# Altium PCB NBP15 Xilinx XC9500XL XC9500XV PQ208 Rev1.01.PcbDoc (part 1 of 2)
Units mm, origin at the board's own origin, x right, y up, seen from the top; angles counter-clockwise.
Board outline 69 x 80.99 mm, 2 copper layers (Top Layer, Bottom Layer); 37 components, 186 nets, 485 pads, 89 vias.
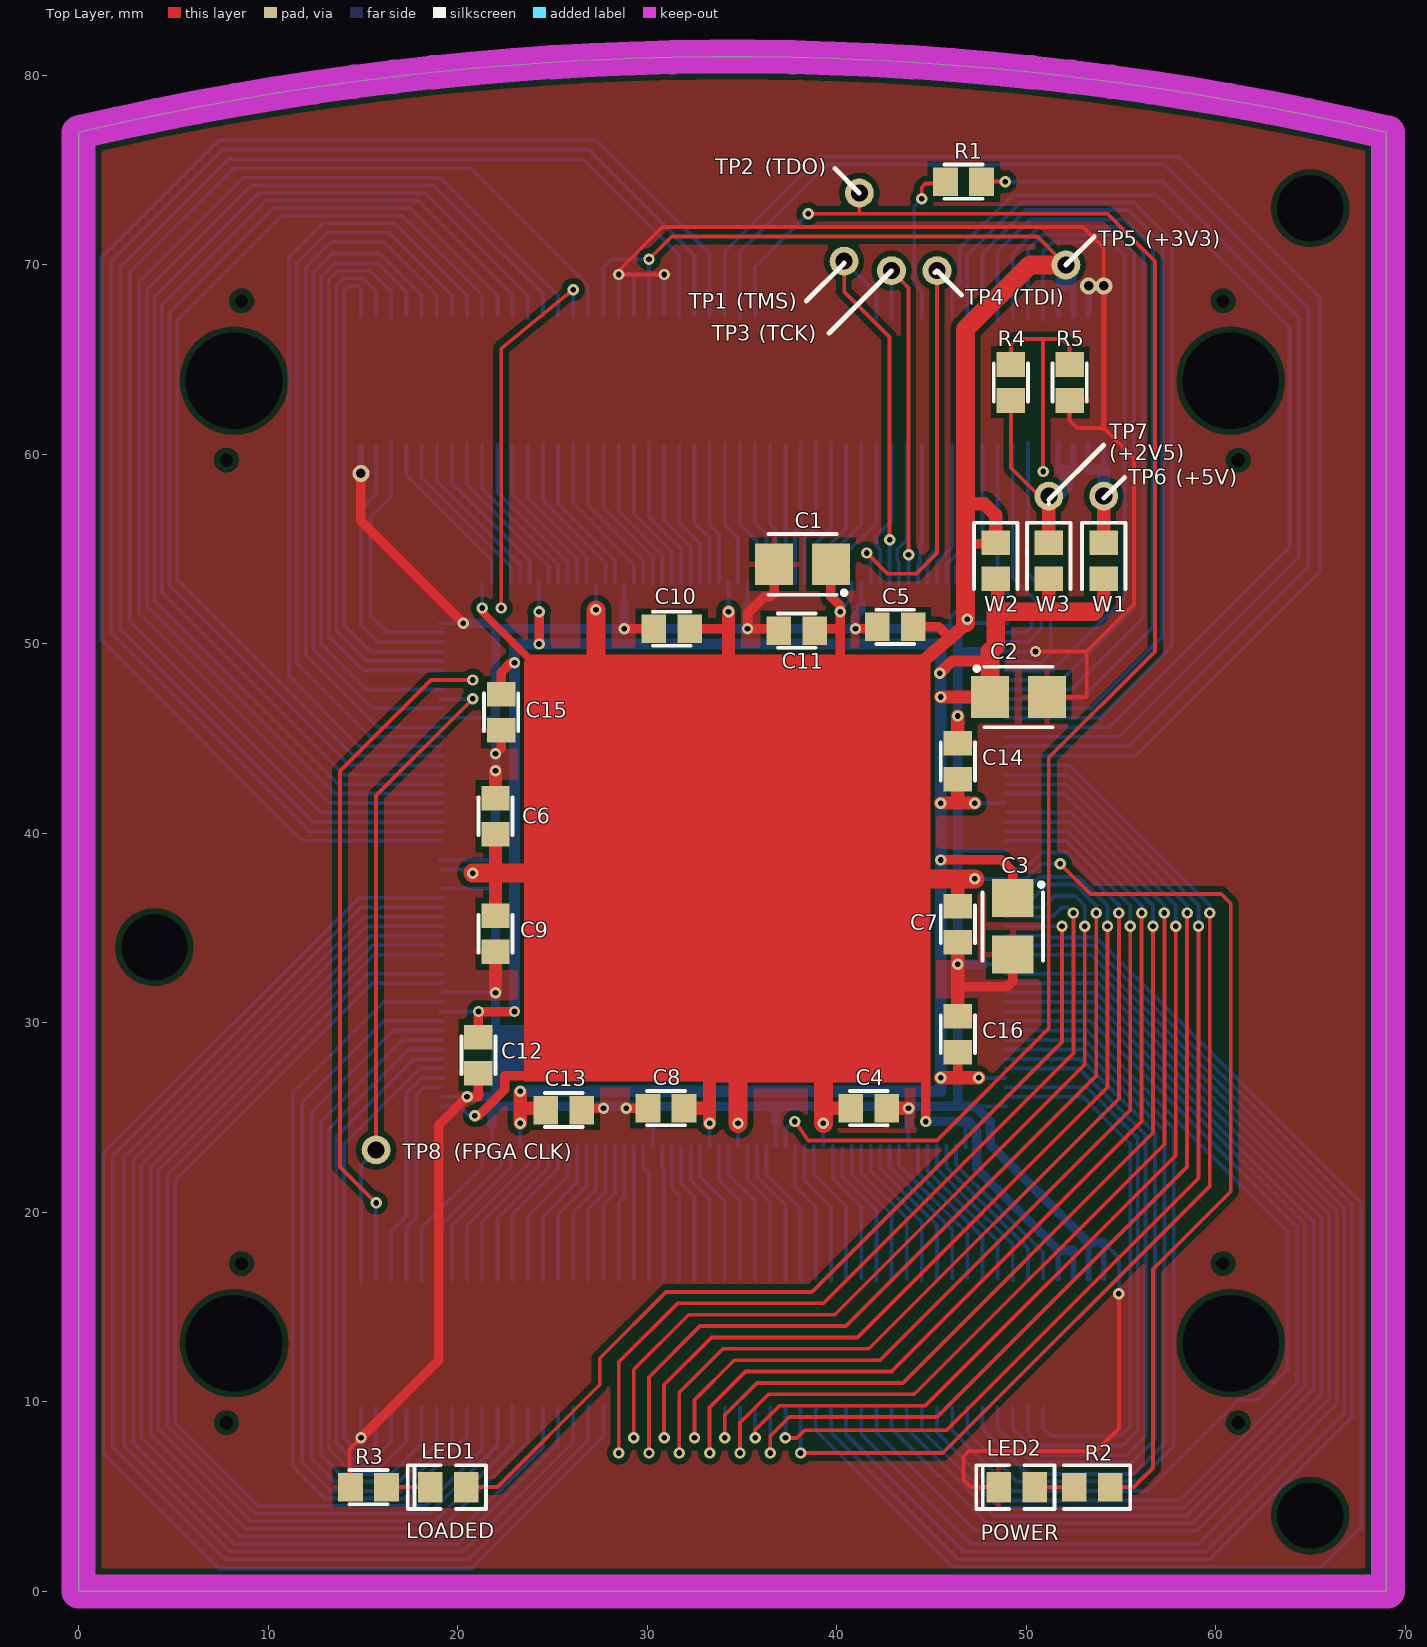
[diagram p0: Top Layer view]
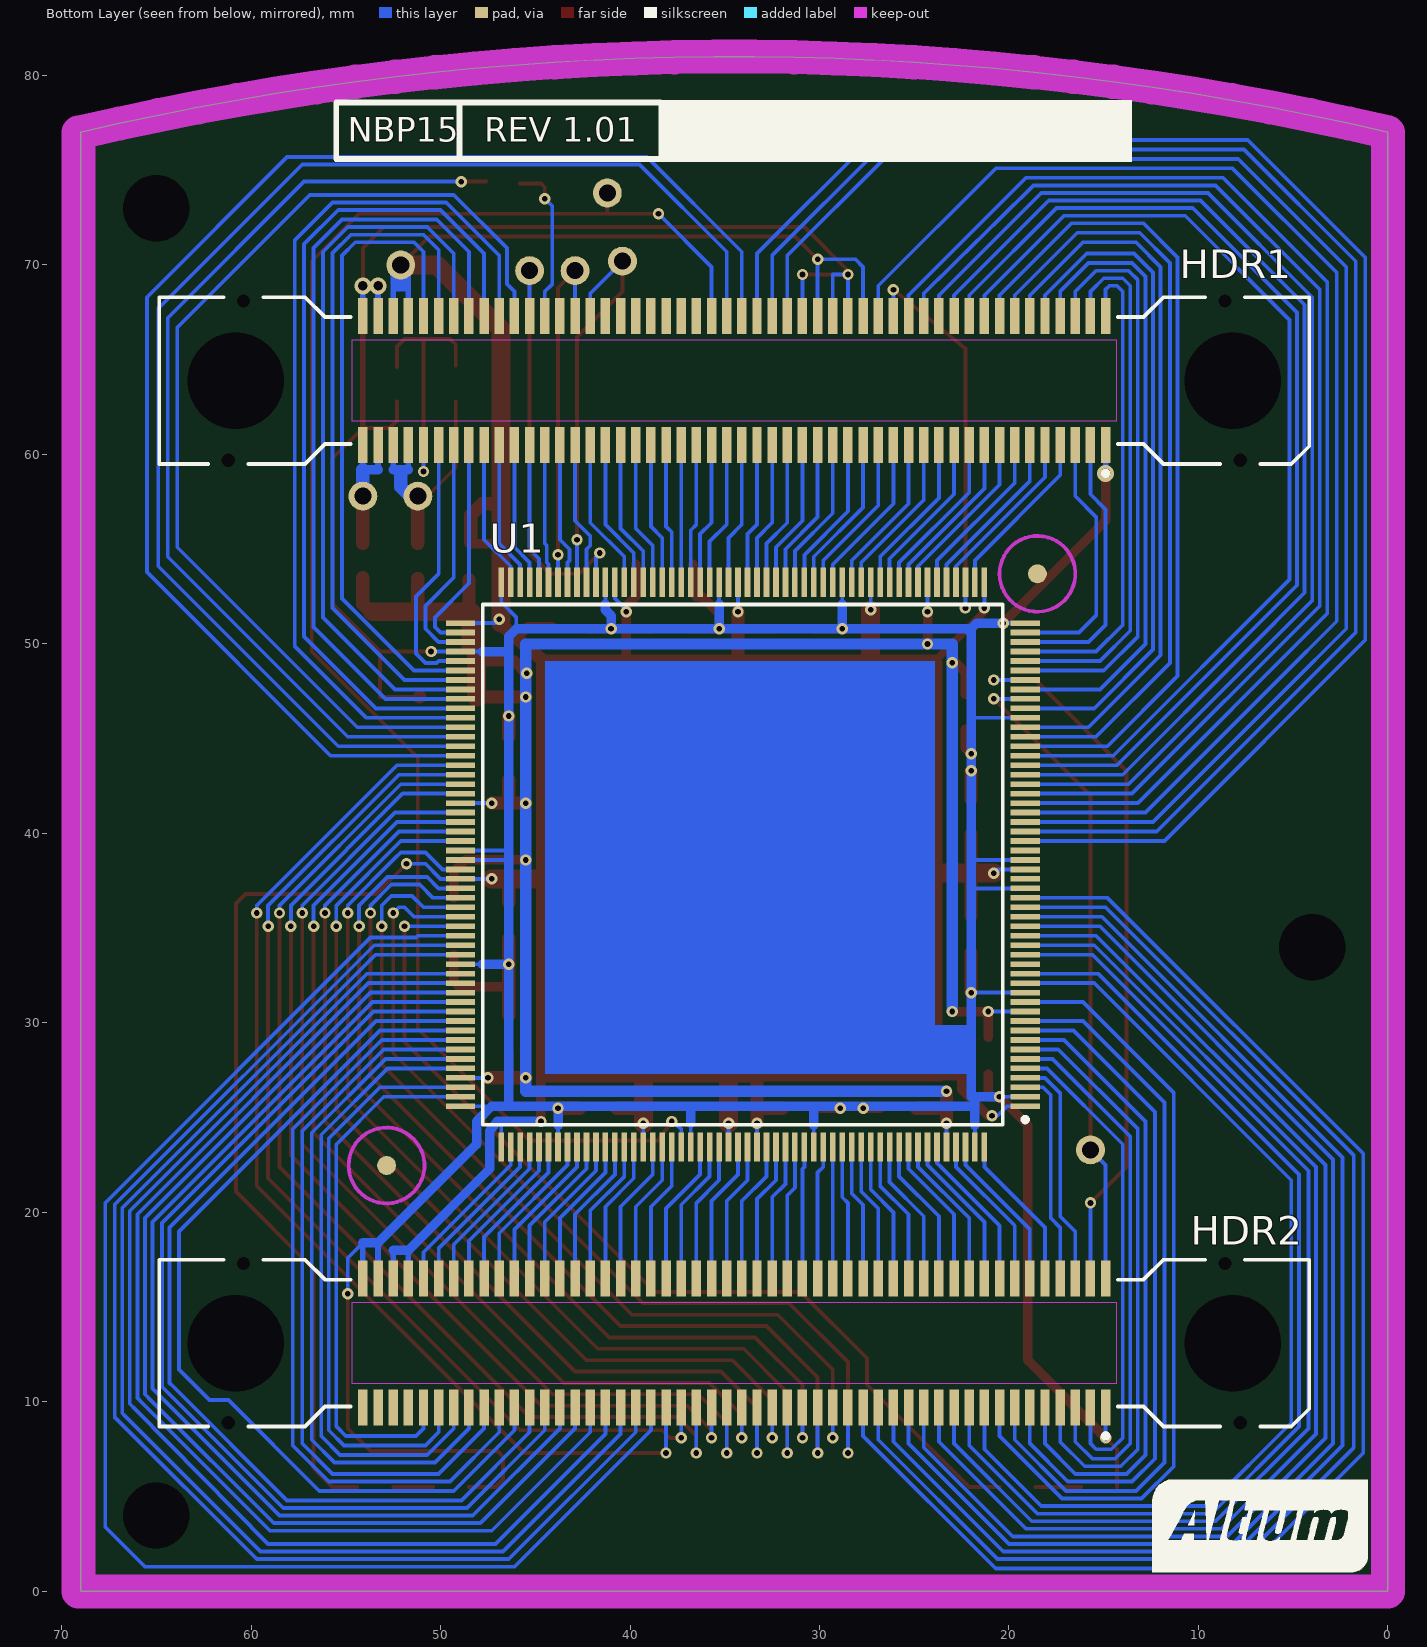
[diagram p1: Bottom Layer view, seen from below]

## Layer stack, top to bottom
Top Layer: signal copper 0.0356
Dielectric: core 0.32, FR-4, Dk 4.8
Bottom Layer: signal copper 0.0356

## Board outline
0,0 0.001,77 cw(c34.5,-69.801) 69,77 69,0

## Design rules (kind name [scope] priority, off if disabled: settings)
AcuteAngle [All] p1 off: minimum=4.50000000000000E+0001
Clearance Clearance_Polygons [InPolygon] p1: gap=0.3
Clearance [All] p2: gap=0.2
ComponentClearance [All] p1: gap=0.2 collisioncheckmode=3 verticalgap=0.254 showdistances=FALSE
FabricationTestPointUsage TestPointUsage [All] p1 off: valid=0 allowmultiple=FALSE
FabricationTestpoint Testpoint [All] p1 off: side=3 testpointundercomponent=TRUE minsize=1.016 maxsize=2.54 preferedsize=1.524 minholesize=0 maxholesize=1.016 preferedholesize=0.813 testpointgrid=0.025 allowsidetop=TRUE allowsidebottom=TRUE usegrid=TRUE gridtolerance=0
HoleSize [All] p1: absolutevalues=TRUE maxlimit=5.2 minlimit=0.25 maxpercent=80.000 minpercent=20.000
MaximumViaCount [All] p1 off: limit=2
PlaneClearance [All] p1: clearance=0.45
PlaneConnect [All] p1: planeconnectstyle=Direct reliefexpansion=0.5 reliefentries=4 reliefconductorwidth=0.25 reliefairgap=0.25
PolygonConnect [All] p1: connectstyle=Relief reliefconductorwidth=0.3 reliefentries=4 polygonreliefangle="90 Angle"
RoomDefinition BOC_XC95288_PQ208 [InComponentClass('BOC_XC95288_PQ208')] p1 off: confinementstyle=ConfineIn formatcopy=TRUE lockcomponents=FALSE outline 3.6,3.7 65.2,3.7 65.2,75.8 3.6,75.8
RoutingVias [All] p1: holewidth=0.3 width=0.6 viastyle="Through Hole" minholewidth=0.3 minwidth=0.6 maxholewidth=0.5 maxwidth=1.4
SMDNeckDown [All] p1: percent=80.000
SilkscreenOverComponentPads [All] p1: minsilkscreentomaskgap=0.254
SolderMaskExpansion SolderMaskExpansion_Vias [IsVia] p1: expansion=-0.15
SolderMaskExpansion [All] p2: expansion=0.15
Width [All] p1: maxlimit=1.4 minlimit=0.2 preferedwidth=1 bottomlayer_prefwidth=0.2
21 further rules are at their usual default settings.

## Components (designator, comment, footprint, x,y, rotation, side; value= is the part's Value field where it differs from the comment)
C1 "10uF" MCCT-B 38.2,54.2 r180 top
C2 "10uF" MCCT-B 49.6,47.2 r0 top
C3 "10uF" MCCT-B 49.3,35.1 r270 top
C4 "0.1uF" CC2012-0805 41.7,25.5 r0 top
C5 "0.1uF" CC2012-0805 43.1,50.9 r180 top
C6 "0.1uF" CC2012-0805 22,40.9 r90 top
C7 "0.1uF" CC2012-0805 46.4,35.2 r270 top
C8 "0.1uF" CC2012-0805 31,25.5 r180 top
C9 "0.1uF" CC2012-0805 22,34.7 r270 top
C10 "0.1uF" CC2012-0805 31.3,50.8 r180 top
C11 "0.1uF" CC2012-0805 37.9,50.7 r180 top
C12 "0.1uF" CC2012-0805 21.1,28.3 r270 top
C13 "0.1uF" CC2012-0805 25.6,25.4 r0 top
C14 "0.1uF" CC2012-0805 46.4,43.8 r90 top
C15 "0.1uF" CC2012-0805 22.3,46.4 r270 top
C16 "0.1uF" CC2012-0805 46.4,29.4 r90 top
HDR1 "54075-1009-HD1" 54075 34.5,63.9 r0 bottom locked
HDR2 "54075-1009-HD2" 54075 34.5,13.1 r0 bottom locked
LED1 "HSMG-C170" "SMD _LED" 19.5,5.5 r0 top locked
LED2 "HSMH-C170" "SMD _LED" 49.5,5.5 r0 top locked
R1 "100R" CC2012-0805 46.7,74.4 r0 top
R2 "270R" CC2012-0805 53.5,5.5 r180 top locked
R3 "270R" CC2012-0805 15.3,5.5 r0 top
R4 "82R/1%" CC2012-0805 49.2,63.8 r90 top
R5 "680R/1%" CC2012-0805 52.3,63.8 r270 top
TP1 "TestPin" TestPin 40.4,70.2 r90 top
TP2 "TestPin" TestPin 41.2,73.8 r90 top
TP3 "TestPin" TestPin 42.9,69.7 r90 top
TP4 "TestPin" TestPin 45.3,69.7 r90 top
TP5 "TestPin" TestPin 52.1,70 r90 top
TP6 "TestPin" TestPin 54.1,57.8 r90 top
TP7 "TestPin" TestPin 51.2,57.8 r90 top
TP8 "TestPin" TestPin 15.7,23.3 r90 top
U1 "XC95288XL-10PQ208C" PQ208 34.05,38.35 r0 bottom locked
W1 "Jumper" CC2012-0805 54.1,54.4 r270 top
W2 "Jumper" CC2012-0805 48.4,54.4 r270 top
W3 "Jumper" CC2012-0805 51.2,54.4 r270 top

## Footprints (in the part's own frame and the unit in brackets; to place one, negate y for a bottom-side part, rotate by r counter-clockwise, add the part's x,y. Pads: shape width x height; smd on the part's side, far side on the other; paste and mask are expansions set on the pad)
54075 [mm] "Connector; Docking Station, Receptacle; 100 Position; Vertical"
  rect 0.5x1.9 smd: 1(-19.6,3.4) 2(-19.6,-3.4) 3(-18.8,3.4) 4(-18.8,-3.4) 5(-18,3.4) 6(-18,-3.4) 7(-17.2,3.4) 8(-17.2,-3.4) 9(-16.4,3.4) 10(-16.4,-3.4) 11(-15.6,3.4) 12(-15.6,-3.4) 13(-14.8,3.4) 14(-14.8,-3.4) 15(-14,3.4) 16(-14,-3.4) 17(-13.2,3.4) 18(-13.2,-3.4) 19(-12.4,3.4) 20(-12.4,-3.4) 21(-11.6,3.4) 22(-11.6,-3.4) 23(-10.8,3.4) 24(-10.8,-3.4) 25(-10,3.4) 26(-10,-3.4) 27(-9.2,3.4) 28(-9.2,-3.4) 29(-8.4,3.4) 30(-8.4,-3.4) 31(-7.6,3.4) 32(-7.6,-3.4) 33(-6.8,3.4) 34(-6.8,-3.4) 35(-6,3.4) 36(-6,-3.4) 37(-5.2,3.4) 38(-5.2,-3.4) 39(-4.4,3.4) 40(-4.4,-3.4) 41(-3.6,3.4) 42(-3.6,-3.4) 43(-2.8,3.4) 44(-2.8,-3.4) 45(-2,3.4) 46(-2,-3.4) 47(-1.2,3.4) 48(-1.2,-3.4) 49(-0.4,3.4) 50(-0.4,-3.4) 51(0.4,3.4) 52(0.4,-3.4) 53(1.2,3.4) 54(1.2,-3.4) 55(2,3.4) 56(2,-3.4) 57(2.8,3.4) 58(2.8,-3.4) 59(3.6,3.4) 60(3.6,-3.4) 61(4.4,3.4) 62(4.4,-3.4) 63(5.2,3.4) 64(5.2,-3.4) 65(6,3.4) 66(6,-3.4) 67(6.8,3.4) 68(6.8,-3.4) 69(7.6,3.4) 70(7.6,-3.4) 71(8.4,3.4) 72(8.4,-3.4) 73(9.2,3.4) 74(9.2,-3.4) 75(10,3.4) 76(10,-3.4) 77(10.8,3.4) 78(10.8,-3.4) 79(11.6,3.4) 80(11.6,-3.4) 81(12.4,3.4) 82(12.4,-3.4) 83(13.2,3.4) 84(13.2,-3.4) 85(14,3.4) 86(14,-3.4) 87(14.8,3.4) 88(14.8,-3.4) 89(15.6,3.4) 90(15.6,-3.4) 91(16.4,3.4) 92(16.4,-3.4) 93(17.2,3.4) 94(17.2,-3.4) 95(18,3.4) 96(18,-3.4) 97(18.8,3.4) 98(18.8,-3.4) 99(19.6,3.4) 100(19.6,-3.4)
  round 0.5 hole 0.7 unplated: MH1(-26.7,4.2) MH2(-25.9,-4.2) MH3(26.7,4.2) MH4(25.9,-4.2)
  round 4.8 hole 5.1 unplated: MH5(-26.3,0) MH6(26.3,0)
  Top Layer keep-out region: -20.15,2.15 20.15,2.15 20.15,-2.15 -20.15,-2.15
  silkscreen extent -30.35,-4.4 30.35,5.02
CC2012-0805 [mm]
  rect 1.3x1.5 smd: 1(-0.95,0) 2(0.95,0)
  silkscreen extent -1,-0.9 1,0.9
MCCT-B [mm]
  rect 2x2.2 smd: 1(-1.5,0) 2(1.5,0)
  silkscreen extent -2.3,-1.6 1.8,1.6
PQ208 [mm] "208-Pin Plastic Quad Flat Pack (PQ208)"
  rect 1.55x0.3 smd: 1(-14.9,12.75) 2(-14.9,12.25) 3(-14.9,11.75) 4(-14.9,11.25) 5(-14.9,10.75) 6(-14.9,10.25) 7(-14.9,9.75) 8(-14.9,9.25) 9(-14.9,8.75) 10(-14.9,8.25) 11(-14.9,7.75) 12(-14.9,7.25) 13(-14.9,6.75) 14(-14.9,6.25) 15(-14.9,5.75) 16(-14.9,5.25) 17(-14.9,4.75) 18(-14.9,4.25) 19(-14.9,3.75) 20(-14.9,3.25) 21(-14.9,2.75) 22(-14.9,2.25) 23(-14.9,1.75) 24(-14.9,1.25) 25(-14.9,0.75) 26(-14.9,0.25) 27(-14.9,-0.25) 28(-14.9,-0.75) 29(-14.9,-1.25) 30(-14.9,-1.75) 31(-14.9,-2.25) 32(-14.9,-2.75) 33(-14.9,-3.25) 34(-14.9,-3.75) 35(-14.9,-4.25) 36(-14.9,-4.75) 37(-14.9,-5.25) 38(-14.9,-5.75) 39(-14.9,-6.25) 40(-14.9,-6.75) 41(-14.9,-7.25) 42(-14.9,-7.75) 43(-14.9,-8.25) 44(-14.9,-8.75) 45(-14.9,-9.25) 46(-14.9,-9.75) 47(-14.9,-10.25) 48(-14.9,-10.75) 49(-14.9,-11.25) 50(-14.9,-11.75) 51(-14.9,-12.25) 52(-14.9,-12.75) 105(14.9,-12.75) 106(14.9,-12.25) 107(14.9,-11.75) 108(14.9,-11.25) 109(14.9,-10.75) 110(14.9,-10.25) 111(14.9,-9.75) 112(14.9,-9.25) 113(14.9,-8.75) 114(14.9,-8.25) 115(14.9,-7.75) 116(14.9,-7.25) 117(14.9,-6.75) 118(14.9,-6.25) 119(14.9,-5.75) 120(14.9,-5.25) 121(14.9,-4.75) 122(14.9,-4.25) 123(14.9,-3.75) 124(14.9,-3.25) 125(14.9,-2.75) 126(14.9,-2.25) 127(14.9,-1.75) 128(14.9,-1.25) 129(14.9,-0.75) 130(14.9,-0.25) 131(14.9,0.25) 132(14.9,0.75) 133(14.9,1.25) 134(14.9,1.75) 135(14.9,2.25) 136(14.9,2.75) 137(14.9,3.25) 138(14.9,3.75) 139(14.9,4.25) 140(14.9,4.75) 141(14.9,5.25) 142(14.9,5.75) 143(14.9,6.25) 144(14.9,6.75) 145(14.9,7.25) 146(14.9,7.75) 147(14.9,8.25) 148(14.9,8.75) 149(14.9,9.25) 150(14.9,9.75) 151(14.9,10.25) 152(14.9,10.75) 153(14.9,11.25) 154(14.9,11.75) 155(14.9,12.25) 156(14.9,12.75)
  rect 0.3x1.55 smd: 53(-12.75,-14.9) 54(-12.25,-14.9) 55(-11.75,-14.9) 56(-11.25,-14.9) 57(-10.75,-14.9) 58(-10.25,-14.9) 59(-9.75,-14.9) 60(-9.25,-14.9) 61(-8.75,-14.9) 62(-8.25,-14.9) 63(-7.75,-14.9) 64(-7.25,-14.9) 65(-6.75,-14.9) 66(-6.25,-14.9) 67(-5.75,-14.9) 68(-5.25,-14.9) 69(-4.75,-14.9) 70(-4.25,-14.9) 71(-3.75,-14.9) 72(-3.25,-14.9) 73(-2.75,-14.9) 74(-2.25,-14.9) 75(-1.75,-14.9) 76(-1.25,-14.9) 77(-0.75,-14.9) 78(-0.25,-14.9) 79(0.25,-14.9) 80(0.75,-14.9) 81(1.25,-14.9) 82(1.75,-14.9) 83(2.25,-14.9) 84(2.75,-14.9) 85(3.25,-14.9) 86(3.75,-14.9) 87(4.25,-14.9) 88(4.75,-14.9) 89(5.25,-14.9) 90(5.75,-14.9) 91(6.25,-14.9) 92(6.75,-14.9) 93(7.25,-14.9) 94(7.75,-14.9) 95(8.25,-14.9) 96(8.75,-14.9) 97(9.25,-14.9) 98(9.75,-14.9) 99(10.25,-14.9) 100(10.75,-14.9) 101(11.25,-14.9) 102(11.75,-14.9) 103(12.25,-14.9) 104(12.75,-14.9) 157(12.75,14.9) 158(12.25,14.9) 159(11.75,14.9) 160(11.25,14.9) 161(10.75,14.9) 162(10.25,14.9) 163(9.75,14.9) 164(9.25,14.9) 165(8.75,14.9) 166(8.25,14.9) 167(7.75,14.9) 168(7.25,14.9) 169(6.75,14.9) 170(6.25,14.9) 171(5.75,14.9) 172(5.25,14.9) 173(4.75,14.9) 174(4.25,14.9) 175(3.75,14.9) 176(3.25,14.9) 177(2.75,14.9) 178(2.25,14.9) 179(1.75,14.9) 180(1.25,14.9) 181(0.75,14.9) 182(0.25,14.9) 183(-0.25,14.9) 184(-0.75,14.9) 185(-1.25,14.9) 186(-1.75,14.9) 187(-2.25,14.9) 188(-2.75,14.9) 189(-3.25,14.9) 190(-3.75,14.9) 191(-4.25,14.9) 192(-4.75,14.9) 193(-5.25,14.9) 194(-5.75,14.9) 195(-6.25,14.9) 196(-6.75,14.9) 197(-7.25,14.9) 198(-7.75,14.9) 199(-8.25,14.9) 200(-8.75,14.9) 201(-9.25,14.9) 202(-9.75,14.9) 203(-10.25,14.9) 204(-10.75,14.9) 205(-11.25,14.9) 206(-11.75,14.9) 207(-12.25,14.9) 208(-12.75,14.9)
  silkscreen extent -15.02,-13.72 13.73,13.73
"SMD _LED" [mm]
  rect 1.3x1.6 smd: 1(0.95,0) 2(-0.95,0)
  silkscreen extent -2.13,-1.15 2,1.15
TestPin [mil] "SingleTest Pin"
  round 60 hole 35.43: 1(0,0)

## Part data
C1 C2 C3: library part CAP_POLAR, "Polar Capacitor"
C4 C5 C6 C7 C8 C9 C10 C11 C12 C13 C14 C15 C16: library part CAP, "Capacitor"
HDR1 HDR2: "Board-to-Board, Docking Station, 0.80mm (.031\") Pitch, Shielded Receptacle, Vertical, Ultra Low Profile, SMT"
LED1 LED2: library part HSMX-C670, "Typical RED GaAs SMD LED Agilent make"
R1 R2 R3 R4 R5: library part RES, "Resistor"
U1: "FastFLASH XC95288XL High Performance CPLD with 288 Macrocells, 208-Pin PQFP, Commercial Grade"
W1 W2 W3: "Jumper Wire"

## Free pads (board coordinates)
  round 1 smd far side mask+1.5: FD3(18.5,53.7) FD3(52.85,22.475)
  round 3.2 hole 3.5 unplated: LP(4,34) LP(65,4) LP(65,73)

## Via types
v1: diameter 0.6, hole 0.3, Top Layer to Bottom Layer, tented both sides, 86 vias
v2: diameter 0.9, hole 0.5, Top Layer to Bottom Layer, tented both sides, 3 vias

## Nets (pads, with @x,y where several pads share a name; then routed paths per layer and width w, separated by ;. In a path a pad name is that pad's centre, name@x,y a point inside that pad or via, vN(x,y) a via of type N, cw(c..) or ccw(c..) an arc to the next point about the centre after c; other vN are vias at no path point)
AUDIO_SPI_CSN: HDR1.11 U1.57 | length 9.1
  Bottom Layer w0.2: HDR1.11@18.9,60.5 18.9,58.6 23.3,54.2 U1.57@23.3,53.2
BLUE0: HDR1.14 U1.40 | length 41.6
  Bottom Layer w0.2: U1.40@19.2,45.1 15.4,45.1 11.5,49 11.5,70.1 13.1,71.7 16.4,71.7 19.7,68.4 HDR1.14@19.7,67.4
BLUE1: HDR1.16 U1.39 | length 44.5
  Bottom Layer w0.2: U1.39@19.1,44.6 14.8,44.6 11.1,48.3 11.1,70.4 12.9,72.2 16.7,72.2 20.5,68.4 HDR1.16@20.5,67.3
BOC_CTS: HDR1.13 U1.58 | length 9
  Bottom Layer w0.2: HDR1.13@19.7,60.5 19.7,58.5 23.8,54.4 U1.58@23.8,53.2
BOC_RTS: HDR1.17 U1.61 | length 9
  Bottom Layer w0.2: HDR1.17@21.3,60.5 21.3,58.2 25.3,54.2 U1.61@25.3,53.2
BOC_RX: HDR1.19 U1.62 | length 8.8
  Bottom Layer w0.2: HDR1.19@22.1,60.5 22.1,58 25.8,54.3 U1.62@25.8,53.2
BOC_TX: HDR1.15 U1.60 | length 9.2
  Bottom Layer w0.2: HDR1.15@20.5,60.6 HDR1.15@20.5,60.5 20.5,58.4 24.8,54.1 U1.60@24.8,53.2
BUZZER: HDR2.24 U1.199 | length 8
  Bottom Layer w0.2: HDR2.24@23.7,16.4 23.7,19.8 25.8,21.9 U1.199@25.8,23.5
CAN_RXD: HDR1.4 U1.48 | length 28.3
  Bottom Layer w0.2: HDR1.4@15.7,67.3 15.7,68.6 15,69.3 14,69.3 13.6,68.9 13.6,50.7 15.2,49.1 U1.48@19.2,49.1
CAN_TXD: HDR1.2 U1.49 | length 29.6
  Bottom Layer w0.2: HDR1.2@14.9,67.3 14.9,68.7 14.7,68.9 14.3,68.9 14,68.6 14,61.1 14,51 15.4,49.6 19.2,49.6 15.5,49.6
FPGA_AUX0: HDR1.86 U1.113 | length 42.4
  Bottom Layer w0.2: HDR1.86@48.5,67.1 48.5,70.7 50.2,72.4 55.2,72.4 56.7,70.9 56.7,50.9 52.9,47.1 U1.113@49,47.1
FPGA_AUX1: HDR1.88 U1.112 | length 39.6
  Bottom Layer w0.2: U1.112@48.9,47.6 52.4,47.6 56.2,51.4 56.2,70.7 54.9,72 50.7,72 49.3,70.6 HDR1.88@49.3,67.2
FPGA_AUX2: HDR1.90 U1.111 | length 37
  Bottom Layer w0.2: U1.111@48.9,48.1 51.9,48.1 55.7,51.9 55.7,70.634 54.734,71.6 50.9,71.6 50.1,70.8 HDR1.90@50.1,67.2
FPGA_AUX3: HDR1.92 U1.110 | length 34.4
  Bottom Layer w0.2: U1.110@48.9,48.6 51.4,48.6 55.2,52.4 55.2,70.5 54.5,71.2 51.4,71.2 50.9,70.7 HDR1.92@50.9,67.3 HDR1.92@50.9,67.1
FPGA_CCLK: HDR1.66
FPGA_CLK: HDR2.2 TP8.1 U1.44 | length 34.9
  Top Layer w0.2: TP8.1@15.7,23.3 15.7,42 v1(20.8,47.1)
  Bottom Layer w0.2: HDR2.2@14.9,16.3 14.9,22.5 TP8.1@15.7,23.3 ; U1.44@19.1,47.1 v1(20.8,47.1)
FPGA_CLK_1: HDR1.30 U1.55 | length 21.3
  Top Layer w0.2: v1(22.3,51.9) 22.3,65.6 v1(26.1,68.7)
  Bottom Layer w0.2: v1(22.3,51.9) U1.55@22.3,53.2 ; HDR1.30@26.1,67.3 v1(26.1,68.7)
FPGA_CLK_2: HDR1.32 U1.32 | length 69.7
  Bottom Layer w0.2: U1.32@19.2,41.1 12.8,41.1 5.8,48.1 2.7,51.2 2.7,58.5 2.7,69.6 8.2,75.1 19.6,75.1 20.7,75.1 26.9,68.9 HDR1.32@26.9,67.3
FPGA_DIN: HDR1.64
FPGA_DONE: HDR1.74
FPGA_INIT: HDR1.68
FPGA_M0: HDR1.60
FPGA_M1: HDR1.58
FPGA_M2: HDR1.56
FPGA_PROGRAM: HDR1.62
FPGA_TCK: HDR1.72 TP3.1 U1.98 | length 19.4
  Top Layer w0.2: TP3.1@42.9,69.7 43.8,68.8 v1(43.8,54.7)
  Bottom Layer w0.2: HDR1.72@42.9,67.2 TP3.1@42.9,69.7 ; U1.98@43.8,53.2 v1(43.8,54.7)
FPGA_TDI: HDR1.78 TP4.1 U1.94 | length 23.7
  Top Layer w0.2: v1(41.6,54.8) 42.7,53.7 44.2,53.7 45.3,54.8 TP4.1@45.3,69.7
  Bottom Layer w0.2: v1(41.6,54.8) 41.8,54.6 U1.94@41.8,53.2 ; HDR1.78@45.3,67.2 TP4.1@45.3,69.7
FPGA_TDO: HDR1.54 TP2.1 U1.176 | length 87.8
  Top Layer w0.2: v1(37.8,24.8) 38.5,23.8 45.3,23.8 51.2,29.7 51.2,44 56.8,49.6 56.8,70.2 54.3,72.7 v1(38.5,72.7) ; 41.2,72.7 TP2.1@41.2,73.8
  Bottom Layer w0.2: HDR1.54@35.7,67.3 35.7,69.9 v1(38.5,72.7) ; U1.176@37.3,23.45 37.3,24.4 v1(37.8,24.8)
FPGA_TMS: HDR1.70 TP1.1 U1.96 | length 21.7
  Top Layer w0.2: TP1.1@40.4,70.2 40.4,68.6 42.8,66.2 v1(42.8,55.5)
  Bottom Layer w0.2: TP1.1@40.4,70.2 42.1,68.5 HDR1.70@42.1,67.2 ; U1.96@42.8,53.2 v1(42.8,55.5)
GND: C1.2 C2.2 C3.2 C4.2 C5.2 C6.2 C7.2 C8.2 C9.2 C10.2 C11.2 C12.2 C13.2 C14.2 C15.2 C16.2 HDR1.1 HDR1.36 HDR1.38 HDR1.42 HDR1.98 HDR1.100 HDR2.1 HDR2.98 HDR2.100 LED2.2 R3.1 R5.2 U1.2 U1.13 U1.24 U1.27 U1.42 U1.52 U1.68 U1.81 U1.93 U1.104 U1.108 U1.129 U1.130 U1.141 U1.156 U1.163 U1.177 U1.190 U1.207 | length 325.4
  Top Layer w0.2: R3.1@14.3,5.5 14.3,7.5 v1(14.9,8.1) ; v1(30.9,69.5) v1(28.5,69.5) 28.5,69.7 30.8,72 31.1,72 ; 31,72 53,72 54.1,70.9 v2(54.1,68.9) ; LED2.2@48.5,5.5 47.1,5.5 46.7,5.9 46.7,7.1 47,7.4 53.7,7.4 54.9,8.6 v1(54.9,15.7) ; v1(50.5,49.6) 53.2,49.6 ; C2.2@51.1,47.2 53.2,47.2 53.2,49.6 ; R5.2@52.3,62.8 52.3,61.8 52.7,61.4 54.1,61.4 55.7,59.8 55.7,52.1 53.2,49.6
  Top Layer w0.3: 54.1,61.4 v2(54.1,68.9)
  Top Layer w0.5: v1(14.9,8.1) 19,12.2 19,24.6 v1(20.5,26.1) 21.1,26.1 C12.2@21.1,27.3 ; v2@14.9,59.1 14.9,56.5 v1(20.3,51.1) ; v1(22,44.2) 22.3,44.5 C15.2@22.3,45.5 ; C13.2@26.8,25.5 v1(27.7,25.5) ; v1(28.8,50.8) C10.2@30.3,50.8 ; v1(28.9,25.5) C8.2@30,25.5 ; C1.2@36.7,54.2 36.7,52.7 36.5,52.5 36.2,52.5 35.3,51.6 v1(35.3,50.8) C11.2@36.9,50.8 ; v1(41,50.8) C5.2@42.2,50.8 ; 46.4,31.9 49,31.9 49.3,32.2 C3.2@49.3,33.6
  Top Layer w0.7: v1(22,31.6) C9.2@22,33.7 ; C6.2@22,41.8 v1(22,43.3) ; C4.2@42.65,25.5 v1(43.8,25.5) ; C16.2@46.4,30.4 C7.2@46.4,34.45 ; C14.2@46.4,45.1 v1(46.4,46.2)
  Bottom Layer w0.2: v1(14.9,8.1) HDR2.1@14.9,9.7 ; v2@14.9,59.1 HDR1.1@14.9,60.5 ; U1.27@19.1,38.6 U1.27@19.15,38.6 22,38.6 ; U1.52@19.1,51.1 v1(20.3,51.1) ; U1.2@19.15,26.1 v1@20.485,26.1 ; U1.13@19.2,31.6 v1(22,31.6) ; U1.24@19.2,37.1 22,37.1 ; U1.42@19.2,46.1 22,46.1 ; 21.7,51.1 21.865,50.935 ; U1.207@21.8,23.45 21.8,24.6 ; 21.8,25.5 21.8,26.1 ; HDR1.36@28.5,67.3 v1(28.5,69.5) 29.3,69.5 HDR1.38@29.3,67.3 ; 28.8,52.1 U1.68@28.8,53.2 ; U1.190@30.3,23.5 30.3,24.6 ; HDR1.42@30.9,67.4 v1(30.9,69.5) ; 35.3,52.1 U1.81@35.3,53.25 ; U1.177@36.8,23.5 36.8,24.6 ; 41.3,52 U1.93@41.3,53.25 ; U1.163@43.8,23.5 43.8,24.6 ; 46,50.9 46,51.4 46.8,52.2 46.8,53.2 U1.104@46.8,53.25 ; 46.4,38.6 U1.130@48.9,38.6 ; 46.4,39.1 U1.129@48.95,39.1 ; 47.4,25.6 U1.156@48.95,25.6 ; 47.8,33.1 U1.141@48.95,33.1 ; 47.8,49.6 U1.108@48.95,49.6 ; U1.108@48.9,49.6 v1(50.5,49.6) ; 54.1,18.4 54.9,17.6 v1(54.9,15.7)
  Bottom Layer w0.3: v2(14.9,59) HDR1.1@14.9,60.5 ; HDR2.98@53.3,16.5 53.3,18.4 ; HDR1.98@53.3,67.3 v2@53.3,68.8 ; HDR2.100@54.1,16.5 54.1,18.4 ; HDR1.100@54.1,67.3 v2(54.1,68.9)
  Bottom Layer w0.5: v1(20.3,51.1) 21.7,51.1 22.1,50.7 ; v1@20.485,26.1 v1(20.5,26.1) 21.8,26.1 ; 21.8,24.6 21.8,26.1 ; 21.8,25.6 46.4,25.6 ; 28.8,52.1 v1(28.8,50.8) ; 30.3,24.6 30.3,25.5 ; 35.3,52.1 v1(35.3,50.8) ; 36.8,24.7 36.8,25.5 ; 41.3,52.1 41.3,51.8 41,51.5 v1(41,50.8) ; 43.8,24.6 v1(43.8,25.5) ; v1(46.4,33.1) 47.8,33.1 ; 47.8,49.6 46.4,49.6 ; 54.1,18.4 53.3,18.4 48.1,23.6 48.1,24.8 47.3,25.6 46.4,25.6 ; 21.8,26.1 22,26.1 22,29.7 v1(22,31.6) 22,50.8 v1(28.8,50.8) ; v1(28.8,50.8) v1(35.3,50.8) ; v1(35.3,50.8) v1(41,50.8) ; v1(41,50.8) 46,50.8 46.4,50.4 46.4,50 46.4,49.6 ; 46.4,25.6 46.4,49.6
  other v2: 53.3,68.9
GREEN0: HDR1.10 U1.43 | length 36.1
  Bottom Layer w0.2: HDR1.10@18.1,67.3 18.1,68.4 15.9,70.6 13.4,70.6 12.4,69.6 12.4,49.7 15.5,46.6 U1.43@19.2,46.6
GREEN1: HDR1.12 U1.41 | length 39
  Bottom Layer w0.2: HDR1.12@18.9,67.3 18.9,68.4 16.1,71.2 13.3,71.2 12,69.9 12,49.4 15.8,45.6 U1.41@19.2,45.6
HDRIVE: HDR1.18 U1.38 | length 52.8
  Bottom Layer w0.2: U1.38@19.2,44.1 14.5,44.1 5.2,53.4 5.2,67.1 10.7,72.6 17.1,72.6 21.3,68.4 HDR1.18@21.3,67.3
IO0: HDR2.7 U1.7 | length 31.4
  Bottom Layer w0.2: HDR2.7@17.3,9.6 17.3,7.9 16,6.6 14.1,6.6 13.2,7.5 13.2,24.4 17.4,28.6 U1.7@19.2,28.6
IO1: HDR2.9 U1.8 | length 34.1
  Bottom Layer w0.2: HDR2.9@18.1,9.7 18.1,7.8 16.5,6.2 13.8,6.2 12.8,7.2 12.8,24.8 17.1,29.1 U1.8@19.2,29.1
IO2: HDR2.11 U1.9 | length 36.8
  Bottom Layer w0.2: HDR2.11@18.9,9.7 18.9,7.8 16.9,5.8 13.5,5.8 12.3,7 12.3,25.3 16.6,29.6 U1.9@19.2,29.6
IO3: HDR2.13 U1.10 | length 39.5
  Bottom Layer w0.2: U1.10@19.2,30.1 16.1,30.1 11.8,25.8 11.8,6.8 13.3,5.3 17,5.3 19.7,8 HDR2.13@19.7,9.7
IO4: HDR2.15 U1.12 | length 42.4
  Bottom Layer w0.2: U1.12@19.2,31.1 16.1,31.1 11.3,26.3 11.3,6.6 13,4.9 17.2,4.9 20.5,8.2 HDR2.15@20.5,9.7
IO5: HDR2.17 U1.14 | length 52.7
  Bottom Layer w0.2: U1.14@19.2,32.1 15.5,32.1 5.1,21.7 5.1,8.9 9.5,4.5 18.3,4.5 21.3,7.5 HDR2.17@21.3,9.7
IO6: HDR2.19 U1.15 | length 55
  Bottom Layer w0.2: U1.15@19.2,32.6 15.3,32.6 4.7,22 4.7,8.7 9.3,4.1 18.5,4.1 22.1,7.7 HDR2.19@22.1,9.7
IO7: HDR2.21 U1.17 | length 57.7
  Bottom Layer w0.2: U1.17@19.2,33.6 15.6,33.6 4.2,22.2 4.2,8.6 9.1,3.7 12.1,3.7 18.8,3.7 22.9,7.8 HDR2.21@22.9,9.8
IO8: HDR2.23 U1.18 | length 60
  Bottom Layer w0.2: U1.18@19.2,34.1 15.5,34.1 3.8,22.4 3.8,8.3 8.8,3.3 18.4,3.3 19.1,3.3 23.7,7.9 HDR2.23@23.7,9.7
IO9: HDR2.25 U1.19 | length 62.7
  Bottom Layer w0.2: U1.19@19.2,34.6 15.4,34.6 3.3,22.5 3.3,8.1 8.5,2.9 18.7,2.9 19.8,2.9 24.5,7.6 HDR2.25@24.5,9.7
IO10: HDR2.27 U1.20 | length 65.1
  Bottom Layer w0.2: U1.20@19.2,35.1 15.2,35.1 2.9,22.8 2.9,7.8 8.2,2.5 11.2,2.5 20,2.5 25.3,7.8 HDR2.27@25.3,9.7
IO11: HDR2.29 U1.21 | length 67.5
  Bottom Layer w0.2: U1.21@19.2,35.6 15.1,35.6 2.4,22.9 2.4,7.7 8,2.1 10.9,2.1 20.3,2.1 26.1,7.9 HDR2.29@26.1,9.7
IO12: HDR2.31 U1.22 | length 70.2
  Bottom Layer w0.2: U1.22@19.2,36.1 14.9,36.1 1.8,23 1.8,19.9 1.8,7.6 7.7,1.7 10.7,1.7 20.6,1.7 26.9,8 HDR2.31@26.9,9.8
IO13: HDR2.33 U1.23 | length 72.7
  Bottom Layer w0.2: U1.23@19.2,36.6 14.8,36.6 1.3,23.1 1.3,7.3 7.4,1.2 20.7,1.2 27.7,8.2 HDR2.33@27.7,9.8
IO14: HDR2.35 U1.136 | length 49.4
  Top Layer w0.2: v1(28.5,7.3) 28.5,12.1 31.6,15.2 39.3,15.2 52.5,28.4 v1(52.5,35.8)
  Bottom Layer w0.2: v1(28.5,7.3) HDR2.35@28.5,9.8 ; U1.136@48.9,35.6 51.4,35.6 51.9,36.1 52.2,36.1 v1(52.5,35.8)
IO15: HDR2.37 U1.135 | length 48.7
  Top Layer w0.2: v1(29.3,8.1) 29.3,11.7 32.2,14.6 39.9,14.6 53.1,27.8 v1(53.1,35.1)
  Bottom Layer w0.2: v1(29.3,8.1) HDR2.37@29.3,9.7 ; U1.135@48.95,36.1 50.9,36.1 51.5,36.7 52.6,36.7 53.1,36.2 v1(53.1,35.1)
IO16: HDR2.39 U1.134 | length 51.1
  Top Layer w0.2: v1(30.1,7.3) 30.1,11.3 32.8,14 40.5,14 53.7,27.2 v1(53.7,35.8)
  Bottom Layer w0.2: v1(30.1,7.3) HDR2.39@30.1,9.7 ; U1.134@48.9,36.6 50.4,36.6 51.1,37.3 52.6,37.3 53.7,36.2 v1(53.7,35.8)
IO17: HDR2.41 U1.133 | length 50.2
  Top Layer w0.2: v1(30.9,8.1) 30.9,10.9 33.4,13.4 41.1,13.4 54.3,26.6 v1(54.3,35.1)
  Bottom Layer w0.2: v1(30.9,8.1) HDR2.41@30.9,9.7 ; U1.133@48.9,37.1 50.1,37.1 50.7,37.7 52.8,37.7 54.3,36.2 v1(54.3,35.1)
IO18: HDR2.43 U1.131 | length 53
  Top Layer w0.2: v1(31.7,7.3) 31.7,10.5 34,12.8 41.7,12.8 54.9,26 v1(54.9,35.8)
  Bottom Layer w0.2: v1(31.7,7.3) HDR2.43@31.7,9.7 ; U1.131@48.9,38.1 49.9,38.1 50.8,39 52.1,39 52.4,38.7 54.9,36.2 v1(54.9,35.8)
IO19: HDR2.45 U1.128 | length 51.7
  Top Layer w0.2: v1(32.5,8.1) 32.5,10.1 34.6,12.2 42.3,12.2 55.5,25.4 v1(55.5,35.1)
  Bottom Layer w0.2: v1(32.5,8.1) HDR2.45@32.5,9.7 ; U1.128@48.9,39.6 52.1,39.6 55.5,36.2 v1(55.5,35.1)
IO20: HDR2.47 U1.127 | length 60.9
  Top Layer w0.2: v1(33.3,7.3) 33.3,9.7 35.2,11.6 42.9,11.6 ; 36.1,11.6 42.9,11.6 ; v1(56.1,35.8) 56.1,24.8 42.9,11.6
  Bottom Layer w0.2: v1(33.3,7.3) HDR2.47@33.3,9.7 ; U1.127@48.9,40.1 52.2,40.1 56.1,36.2 v1(56.1,35.8)
IO21: HDR2.49 U1.126 | length 53.2
  Top Layer w0.2: v1(34.1,8.1) 34.1,9.3 35.8,11 43.5,11 56.7,24.2 v1(56.7,35.1)
  Bottom Layer w0.2: v1(34.1,8.1) HDR2.49@34.1,9.7 ; U1.126@48.9,40.6 52.3,40.6 56.7,36.2 v1(56.7,35.1)
IO22: HDR2.51 U1.125 | length 55.4
  Top Layer w0.2: v1(34.9,7.3) 34.9,8.9 36.4,10.4 44.1,10.4 57.3,23.6 v1(57.3,35.8)
  Bottom Layer w0.2: v1(34.9,7.3) HDR2.51@34.9,9.7 ; U1.125@49,41.1 52.4,41.1 57.3,36.2 v1(57.3,35.8)
IO23: HDR2.53 U1.123 | length 54.8
  Top Layer w0.2: v1(35.7,8.1) 35.7,8.5 37,9.8 44.7,9.8 57.9,23 v1(57.9,35.1)
  Bottom Layer w0.2: v1(35.7,8.1) HDR2.53@35.7,9.7 ; U1.123@48.9,42.1 U1.123@48.95,42.1 U1.123@49,42.099 ; U1.123@49,42.1 52,42.1 57.9,36.2 v1(57.9,35.1)
IO24: HDR2.55 U1.122 | length 57.1
  Top Layer w0.2: v1(36.5,7.3) 36.5,8.2 37.5,9.2 45.3,9.2 58.5,22.4 v1(58.5,35.8)
  Bottom Layer w0.2: v1(36.5,7.3) HDR2.55@36.5,9.7 ; U1.122@49,42.6 52.1,42.6 58.5,36.2 v1(58.5,35.8)
IO25: HDR2.57 U1.121 | length 56.5
  Top Layer w0.2: v1@37.3,8.2 v1(37.3,8.1) 37.9,8.1 38.3,8.5 45.8,8.5 59.1,21.8 v1(59.1,35.1)
  Bottom Layer w0.2: v1(37.3,8.1) HDR2.57@37.3,9.6 ; U1.121@48.9,43.1 52.2,43.1 59.1,36.2 v1(59.1,35.1)
IO26: HDR2.59 U1.120 | length 58.6
  Top Layer w0.2: v1@38,7.3 45.6,7.3 59.7,21.4 v1(59.7,35.8)
  Bottom Layer w0.2: v1(38.1,7.3) HDR2.59@38.1,9.7 ; U1.120@48.95,43.6 52.3,43.6 59.7,36.2 v1(59.7,35.8)
IO27: HDR2.61 U1.138 | length 75.5
  Bottom Layer w0.2: HDR2.61@38.9,9.7 38.9,8.5 46.1,1.3 58.598,1.3 ; U1.138@48.9,34.6 51.2,34.6 51.3,34.5 53.7,34.5 67.7,20.5 67.7,19.6 67.7,9.754 ; 58.6,1.3 59.3,1.3 65.6,1.3 67.7,3.4 67.7,9.7
IO28: HDR2.63 U1.139 | length 69.9
  Bottom Layer w0.2: HDR2.63@39.7,9.7 39.7,8.4 46.4,1.7 59.7,1.7 67.2,9.2 67.2,20.4 53.5,34.1 U1.139@48.9,34.1
IO29: HDR2.65 U1.140 | length 67.6
  Bottom Layer w0.2: HDR2.65@40.5,9.7 40.5,8.3 46.7,2.1 59.5,2.1 66.7,9.3 66.8,9.4 66.8,19.6 66.8,20.234 53.434,33.6 U1.140@48.9,33.6
IO30: HDR2.67 U1.142 | length 65
  Bottom Layer w0.2: HDR2.67@41.3,9.8 HDR2.67@41.3,9.7 41.3,8.3 47.1,2.5 59.1,2.5 66.1,9.6 66.4,9.9 66.4,19.2 66.4,20.069 53.869,32.6 U1.142@48.9,32.6
IO31: HDR2.69 U1.143 | length 62.2
  Bottom Layer w0.2: HDR2.69@42.1,9.8 42.1,8.4 47.3,3.2 58.1,3.2 59,3.2 65.7,9.9 66,10.2 66,19.9 53.8,32.1 U1.143@48.9,32.1
IO32: HDR2.71 U1.144 | length 59.5
  Bottom Layer w0.2: HDR2.71@42.9,9.7 42.9,8.6 47.9,3.6 58.8,3.6 65.3,10.1 65.6,10.4 65.6,18.8 65.6,19.7 53.7,31.6 U1.144@49,31.6
IO33: HDR2.73 U1.145 | length 57.2
  Bottom Layer w0.2: HDR2.73@43.7,9.7 43.7,8.6 48.3,4 58.5,4 65.2,10.7 65.2,19.5 53.6,31.1 U1.145@48.9,31.1
IO34: HDR2.75 U1.146 | length 54.9
  Bottom Layer w0.2: HDR2.75@44.5,9.8 44.5,8.5 48.6,4.4 58.3,4.4 64.5,10.6 64.7,10.8 64.7,19.434 53.534,30.6 U1.146@48.9,30.6
IO35: HDR2.77 U1.147 | length 52.4
  Bottom Layer w0.2: HDR2.77@45.3,9.7 45.3,8.4 48.9,4.8 58.1,4.8 64.1,10.8 64.3,11 64.3,18.269 ; U1.147@48.9,30.1 53.4,30.1 64.3,19.2 64.3,18.3
JIOA0: HDR1.3 U1.50 | length 14.5
  Bottom Layer w0.2: HDR1.3@15.7,60.5 15.7,57.9 14.9,57.1 14.9,51 15.8,50.1 U1.50@19.2,50.1
JIOA1: HDR1.5 U1.51 | length 13.8
  Bottom Layer w0.2: HDR1.5@16.5,60.7 HDR1.5@16.5,60.5 16.5,57.8 15.4,56.7 15.4,51.5 16.3,50.6 U1.51@19.2,50.6
JIOA2: HDR1.7 U1.54 | length 9.2
  Bottom Layer w0.2: HDR1.7@17.3,60.5 17.3,58.9 21.8,54.4 U1.54@21.8,53.2
JIOA3: HDR1.9 U1.56 | length 9.2
  Bottom Layer w0.2: HDR1.9@18.1,60.5 18.1,58.8 22.8,54.1 U1.56@22.8,53.2
JIOB0: HDR1.83 U1.103 | length 7.9
  Bottom Layer w0.2: U1.103@46.3,53.2 46.3,54.1 47.7,55.5 HDR1.83@47.7,60.5
JIOB1: HDR1.85 U1.106 | length 11.9
  Bottom Layer w0.2: HDR1.85@48.5,60.5 48.5,53.2 50.3,51.4 50.3,50.9 50,50.6 U1.106@48.9,50.6
JIOB2: HDR1.87 U1.107 | length 12.5
  Bottom Layer w0.2: U1.107@48.9,50.1 50.1,50.1 50.8,50.8 50.8,52 49.3,53.5 HDR1.87@49.3,60.5
JIOB3: HDR1.89 U1.109 | length 14.2
  Bottom Layer w0.2: U1.109@48.9,49.1 50.1,49.1 50.2,49 50.8,49 51.3,49.5 51.3,52.5 50.1,53.7 HDR1.89@50.1,60.6
KBCLOCK: HDR1.22 U1.36 | length 57.9
  Bottom Layer w0.2: U1.36@19.2,43.1 14,43.1 7.5,49.6 4.4,52.7 4.4,67.9 9.9,73.4 17.9,73.4 22.9,68.4 HDR1.22@22.9,67.3
KBDATA: HDR1.24 U1.35 | length 60.6
  Bottom Layer w0.2: U1.35@19.2,42.6 13.7,42.6 4,52.3 4,68.3 9.5,73.8 18.3,73.8 23.7,68.4 HDR1.24@23.7,67.2
LCD_BCKL: HDR2.22 U1.200 | length 8.1
  Bottom Layer w0.2: HDR2.22@22.9,16.4 22.9,19.9 25.3,22.3 U1.200@25.3,23.5
LCD_E: HDR2.26 U1.198 | length 7.8
  Bottom Layer w0.2: HDR2.26@24.5,16.4 24.5,19.8 26.3,21.6 U1.198@26.3,23.5
LED0: HDR2.60 U1.178 | length 7.8
  Bottom Layer w0.2: U1.178@36.3,23.5 36.3,22 38.1,20.2 HDR2.60@38.1,16.4
LED1: HDR2.62 U1.175 | length 7.5
  Bottom Layer w0.2: U1.175@37.8,23.5 37.8,21.4 38.9,20.3 HDR2.62@38.9,16.5
LED2: HDR2.64 U1.174 | length 7.7
  Bottom Layer w0.2: U1.174@38.3,23.5 38.3,21.7 39.7,20.3 HDR2.64@39.7,16.4
LED3: HDR2.66 U1.173 | length 7.8
  Bottom Layer w0.2: U1.173@38.8,23.5 38.8,22 40.5,20.3 HDR2.66@40.5,16.4
LED4: HDR2.68 U1.171 | length 7.6
  Bottom Layer w0.2: U1.171@39.8,23.5 39.8,21.8 41.3,20.3 HDR2.68@41.3,16.5
LED5: HDR2.70 U1.170 | length 7.7
  Bottom Layer w0.2: U1.170@40.3,23.4 40.3,21.9 42.1,20.1 HDR2.70@42.1,16.5 HDR2.70@42.1,16.4
LED6: HDR2.72 U1.169 | length 8
  Bottom Layer w0.2: U1.169@40.8,23.5 40.8,22 42.9,19.9 HDR2.72@42.9,16.5 HDR2.72@42.9,16.4
LED7: HDR2.74 U1.168 | length 8
  Bottom Layer w0.2: U1.168@41.3,23.5 41.3,22.1 43.7,19.7 HDR2.74@43.7,16.5
MOUSECLOCK: HDR1.26 U1.34 | length 63.1
  Bottom Layer w0.2: U1.34@19.2,42.1 13.5,42.1 3.6,52 3.6,68.7 9.1,74.2 18.7,74.2 24.5,68.5 HDR1.26@24.5,67.3
MOUSEDATA: HDR1.28 U1.33 | length 65.7
  Bottom Layer w0.2: U1.33@19.2,41.6 13.2,41.6 3.2,51.6 3.2,69.1 8.7,74.6 19.1,74.6 25.3,68.4 HDR1.28@25.3,67.3
NetLED1_2: LED1.2 R3.2 | length 2.4
  Top Layer w0.2: R3.2@16.2,5.5 LED1.2@18.6,5.5
NetLED2_1: LED2.1 R2.2 | length 2.1
  Top Layer w0.2: LED2.1@50.4,5.5 R2.2@52.5,5.5
NEXUS_TCK: HDR1.82 U1.115 | length 47.8
  Bottom Layer w0.2: HDR1.82@46.9,67.2 46.9,70.5 49.7,73.3 55.7,73.3 57.7,71.3 57.7,49.9 53.9,46.1 U1.115@48.95,46.1
NEXUS_TDI: HDR1.84 U1.114 | length 45.1
  Bottom Layer w0.2: HDR1.84@47.7,67.2 47.7,70.6 50,72.9 55.4,72.9 57.2,71.1 57.2,50.4 53.4,46.6 U1.114@49,46.6
NEXUS_TDO: R1.2 U1.117 | length 51.8
  Top Layer w0.2: R1.2@47.6,74.4 v1(48.9,74.4)
  Bottom Layer w0.2: U1.117@48.9,45.1 54.9,45.1 64.4,54.6 64.4,67.2 57.2,74.4 v1(48.9,74.4)
NEXUS_TDO#: HDR1.76 R1.1 | length 8.6
  Top Layer w0.2: v1(44.5,73.5) 44.5,74.1 44.7,74.3 R1.1@45.8,74.3
  Bottom Layer w0.2: HDR1.76@44.5,67.2 HDR1.76@44.5,67.3 44.5,68.6 44.1,69 44.1,73.1 v1(44.5,73.5)
NEXUS_TMS: HDR1.80 U1.116 | length 55.9
  Bottom Layer w0.2: HDR1.80@46.1,67.2 HDR1.80@46.1,67.3 46.1,68.6 46.5,69 46.5,70.9 49.3,73.7 49.8,73.7 56.9,73.7 63.9,66.7 63.9,55.1 54.4,45.6 U1.116@48.9,45.6
PROGRAMMED: LED1.1 U1.137 | length 51.2
  Top Layer w0.2: LED1.1@20.5,5.5 22.1,5.5 27.5,10.9 27.5,12.3 31,15.8 38.7,15.8 51.9,29 v1(51.9,35.1)
  Bottom Layer w0.2: U1.137@48.9,35.1 v1@52,35.1
RAM0_DATA0: HDR2.42 U1.189 | length 7.1
  Bottom Layer w0.2: U1.189@30.8,23.5 30.8,22.4 30.9,22.3 HDR2.42@30.9,16.5 HDR2.42@30.9,16.4
RAM0_DATA1: HDR2.40 U1.191 | length 7.2
  Bottom Layer w0.2: U1.191@29.8,23.5 29.8,22.4 30.1,22.1 HDR2.40@30.1,16.4
RAM0_DATA2: HDR2.38 U1.192 | length 7
  Bottom Layer w0.2: HDR2.38@29.3,16.5 U1.192@29.3,23.5
RAM0_DATA3: HDR2.36 U1.193 | length 7.2
  Bottom Layer w0.2: HDR2.36@28.5,16.4 HDR2.36@28.5,16.5 28.5,20.5 28.8,20.8 U1.193@28.8,23.5
RAM0_DATA4: HDR2.34 U1.194 | length 7.2
  Bottom Layer w0.2: HDR2.34@27.7,16.5 27.7,20.4 28.3,21 U1.194@28.3,23.5
RAM0_DATA5: HDR2.32 U1.195 | length 7.5
  Bottom Layer w0.2: HDR2.32@26.9,16.4 26.9,20.2 27.8,21.1 U1.195@27.8,23.5
RAM0_DATA6: HDR2.30 U1.196 | length 7.5
  Bottom Layer w0.2: HDR2.30@26.1,16.5 26.1,20 27.3,21.2 U1.196@27.3,23.5
RAM0_DATA7: HDR2.28 U1.197 | length 7.6
  Bottom Layer w0.2: HDR2.28@25.3,16.5 25.3,19.9 26.8,21.4 U1.197@26.8,23.5
RAM0_OE: HDR1.41 U1.75 | length 7.9
  Bottom Layer w0.2: HDR1.41@30.9,60.5 30.9,56.5 32.3,55.1 U1.75@32.3,53.2
RAM0_WE: HDR1.79 U1.101 | length 7.6
  Bottom Layer w0.2: U1.101@45.3,53.2 45.3,54.3 46.1,55.1 HDR1.79@46.1,60.5
RAM1_DATA0: HDR1.45 U1.77 | length 7.7
  Bottom Layer w0.2: HDR1.45@32.5,60.6 HDR1.45@32.5,60.5 32.5,56.4 33.3,55.6 U1.77@33.3,53.2
RAM1_DATA1: HDR1.49 U1.80 | length 7.7
  Bottom Layer w0.2: HDR1.49@34.1,60.6 HDR1.49@34.1,60.5 34.1,56.3 34.8,55.6 U1.80@34.8,53.2
RAM1_DATA2: HDR1.53 U1.83 | length 7.6
  Bottom Layer w0.2: HDR1.53@35.7,60.6 35.7,56.4 36.3,55.8 U1.83@36.3,53.2
RAM1_DATA3: HDR1.57 U1.85 | length 13.5
  Bottom Layer w0.2: U1.85@37.3,53.2 HDR1.57@37.3,60.5 37.3,54.3
RAM1_DATA4: HDR1.55 U1.84 | length 7.4
  Bottom Layer w0.2: HDR1.55@36.5,60.5 36.5,56.3 36.8,56 U1.84@36.8,53.2
RAM1_DATA5: HDR1.51 U1.82 | length 7.8
  Bottom Layer w0.2: HDR1.51@34.9,60.6 34.9,56.3 35.8,55.4 U1.82@35.8,53.2
RAM1_DATA6: HDR1.47 U1.78 | length 7.6
  Bottom Layer w0.2: HDR1.47@33.3,60.6 HDR1.47@33.3,60.5 33.3,56.3 33.8,55.8 U1.78@33.8,53.2
RAM1_DATA7: HDR1.43 U1.76 | length 7.8
  Bottom Layer w0.2: HDR1.43@31.7,60.5 31.7,56.4 32.8,55.3 U1.76@32.8,53.2
RAM1_OE: HDR1.39 U1.74 | length 8.1
  Bottom Layer w0.2: HDR1.39@30.1,60.6 HDR1.39@30.1,60.5 30.1,56.7 31.8,55 U1.74@31.8,53.2
RAM1_WE: HDR1.61 U1.87 | length 7.7
  Bottom Layer w0.2: U1.87@38.3,53.2 38.3,55.6 38.9,56.2 HDR1.61@38.9,60.5 HDR1.61@38.9,60.7
RAM_ADDR0: HDR1.21 U1.63 | length 8.7
  Bottom Layer w0.2: HDR1.21@22.9,60.5 22.9,57.9 26.3,54.5 U1.63@26.3,53.2
RAM_ADDR1: HDR1.25 U1.66 | length 8.7
  Bottom Layer w0.2: HDR1.25@24.5,60.5 24.5,57.6 27.8,54.3 U1.66@27.8,53.2
RAM_ADDR2: HDR1.29 U1.69 | length 8.7
  Bottom Layer w0.2: HDR1.29@26.1,60.6 26.1,57.4 29.3,54.2 U1.69@29.3,53.2